# Altium PCB PCB1.PcbDoc
Units mil, origin at the board's own origin, x right, y up, seen from the top; angles counter-clockwise.
Board outline 730 x 1700 mil, 2 copper layers (Top Layer, Bottom Layer); 23 components, 44 nets, 149 pads, 19 vias.
Unrouted connection lines stored in the file: 27.
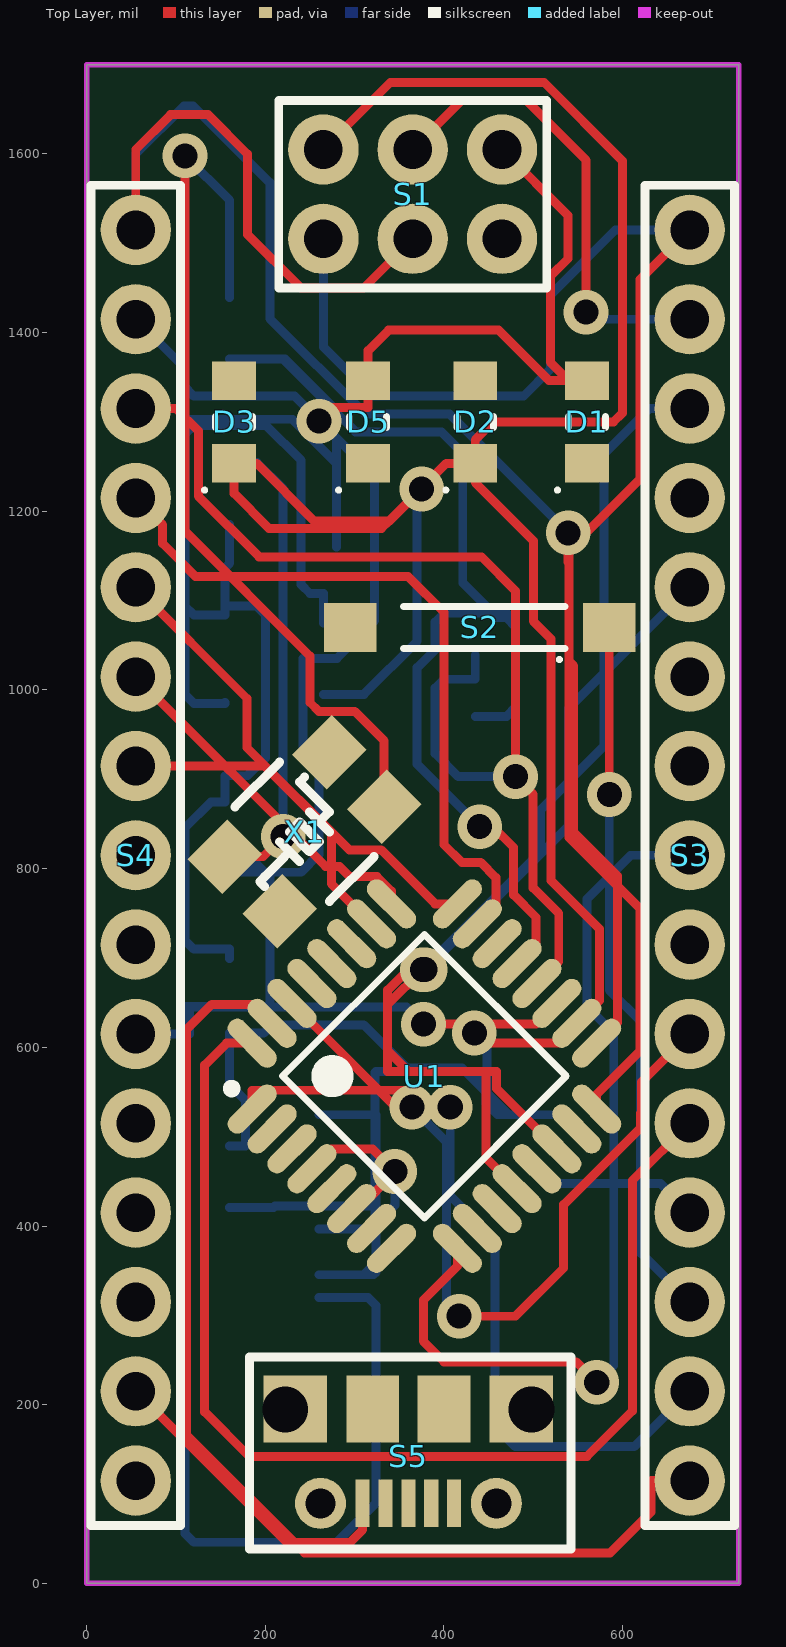
[diagram p0: Top Layer view]
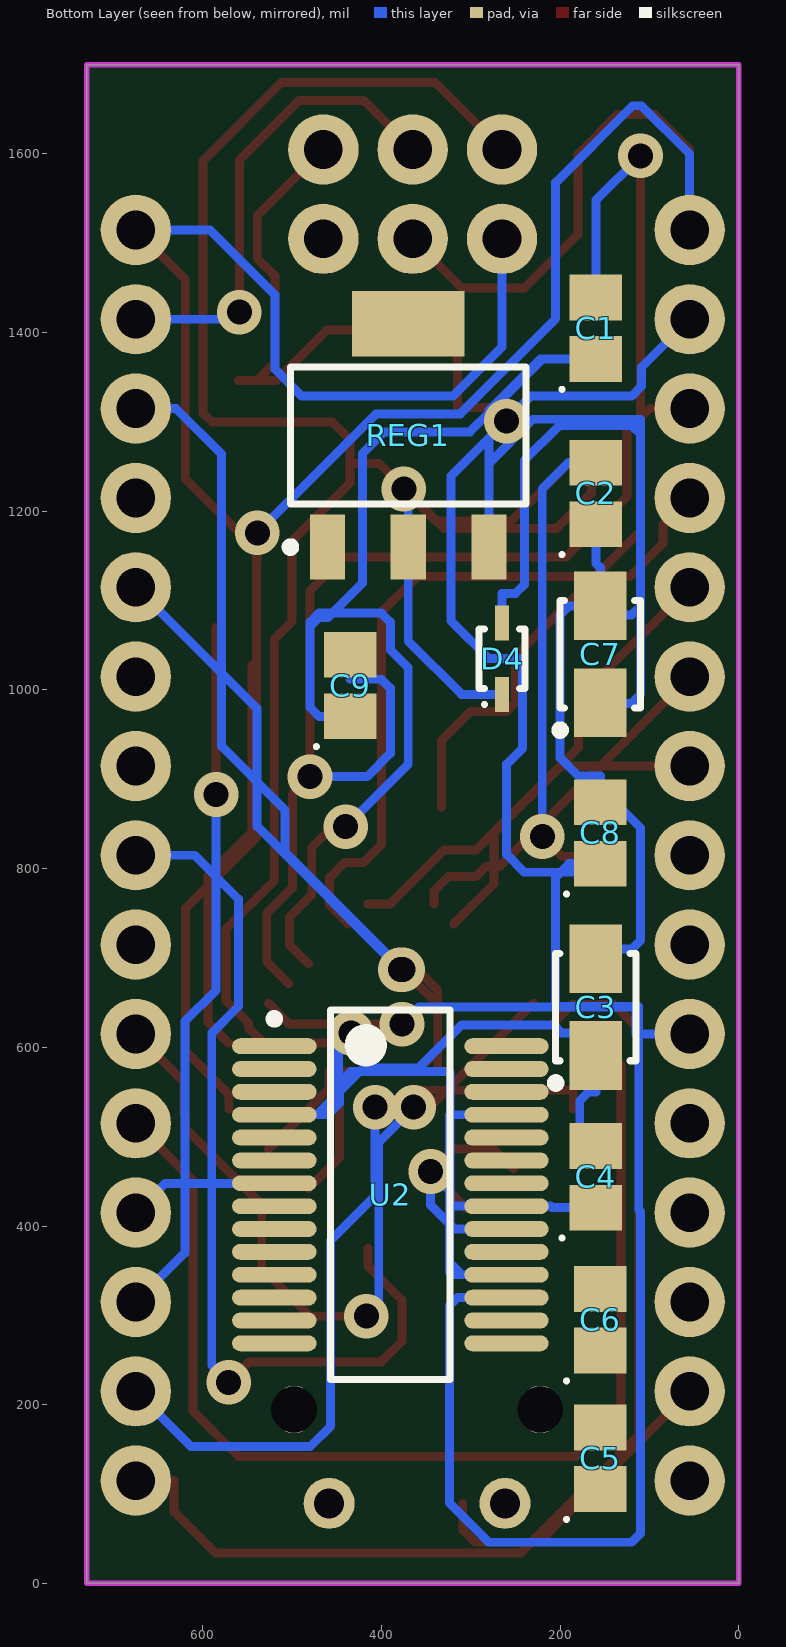
[diagram p1: Bottom Layer view, seen from below]

## Layer stack, top to bottom
Top Solder: solder mask 0.4, Solder Resist, Dk 3.5
Top Layer: signal copper 1.4
Dielectric 1: dielectric 12.6, FR-4, Dk 4.8
Bottom Layer: signal copper 1.4
Bottom Solder: solder mask 0.4, Solder Resist, Dk 3.5

## Board outline
0,0 0,1700 730,1700 730,0

## Design rules (kind name [scope] priority, off if disabled: settings)
Clearance [All] p1: gap=10 ignorepadtopadclearanceinfootprint=FALSE except(0: Arc-Hole Track-Hole SMDPad-Hole THPad-Hole Via-Hole Fill-Hole Poly-Hole Region-Hole Text-Hole)
PolygonConnect [All] p1: connectstyle=Relief reliefconductorwidth=10 reliefentries=4 polygonreliefangle="90 Angle" airgapwidth=10
RoutingVias [All] p1: holewidth=28 width=50 viastyle="Through Hole" minholewidth=28 minwidth=50 maxholewidth=28 maxwidth=50
SolderMaskExpansion [All] p1: expansion=4 istentingtop=FALSE
Width [All] p1: maxlimit=10 minlimit=10 preferedwidth=10
30 further rules are at their usual default settings.

## Components (designator, comment, footprint, x,y, rotation, side; value= is the part's Value field where it differs from the comment)
C1 "C0805C180J5GACTU" CAPCP2012X09N 160,1405 r90 bottom
C2 "C0805C180J5GACTU" CAPCP2012X09N 160,1220 r90 bottom
C3 "Capacitor SMT Tantalum" "CASE A - 3216X18" 160,645 r90 bottom value=4.7µF
C4 "100nF Ceramic Multilayer Capacitor_1" CAPCP2012X09N 160,455 r90 bottom
C5 "100nF Ceramic Multilayer Capacitor_1" CAPCP2012X09N 155,140 r90 bottom
C6 "100nF Ceramic Multilayer Capacitor_1" CAPCP2012X09N 155,295 r90 bottom
C7 "Capacitor SMT Tantalum" "CASE A - 3216X18" 155,1040 r90 bottom value=4.7µF
C8 "100nF Ceramic Multilayer Capacitor_1" CAPCP2012X09N 155,840 r90 bottom
C9 "100nF Ceramic Multilayer Capacitor_1" CAPCP2012X09N 435,1005 r90 bottom
D1 "Kingbright Blue LED, 60 mcd 120 ° 0805" LED1913X12NBLUE 560,1300 r90 top
D2 "Kingbright Red LED, 100 mcd 120 ° 0805" LED1913X12NRED 435,1300 r90 top
D3 "Kingbright Green LED, 70 mcd 120 ° 0805" LED1913X12NGREEN 165,1300 r90 top
D4 "Panasonic DB2J20900L Schottky Diode, 0.5A, 20V, 2.4ns, 2-Pin SMini2 F5 B" DIOM1712X07N 265,1035 r90 bottom
D5 "Kingbright Red LED, 100 mcd 120 ° 0805" LED1913X12NRED 315,1300 r90 top
REG1 "LM1117MP-5.0/NOPB, Low Dropout Voltage Regulator, 1.5A, 5 V ±1%, 4-Pin SOT-223" SOT230P700X180-4N 370,1285 r90 bottom
S1 "Programming Headers Dual Row" "ISP HEADER" -430,2060 r0 top
S2 "Button Tactile Switch, NO 0.05 A 0.8mm" Button8014X17N 445,1070 r180 top
S3 "connector;str header;single row;.1 cont centers;.095 tail;gold or gtx;36 contact" Header 675,115 r90 top
S4 "connector;str header;single row;.1 cont centers;.095 tail;gold or gtx;36 contact" Header 55,115 r90 top
S5 "NewMolex Right Angle SMT Female Type B Micro USB Connector, 30 V ac, 1.8A" MicroUSB 408.58,89.57 r180 top
U1 "ATMEGA328P-AU" TQFP80P900X900X120-32N 378.11,567.78 r45 top
U2 "FT232RL, Universal Asynchronous Receiver & Transmitter 3MBd, 28-Pin, SSOP" SOP65P780X200-28N 390,435 r180 bottom
X1 "Aker 16MHz Crystal SMT" "Aker S5C Crystal" 271.7,930.33 r45 top value=16MHz

## Footprints (in the part's own frame and the unit in brackets; to place one, negate y for a bottom-side part, rotate by r counter-clockwise, add the part's x,y. Pads: shape width x height; smd on the part's side, far side on the other; paste and mask are expansions set on the pad)
"Aker S5C Crystal" [mm]
  rect 1.6x1.4 smd: 1(0,0) 2(-4.2,0) 3(0,-2.2) 4(-4.2,-2.2)
  round 0.254 on Top Overlay: 5(-3,-2.4)
  silkscreen extent -4,-3 -1,0.8, body extent -4.7,-2.8 0.5,0.6, height 1
Button8014X17N [mm] "Chip Inductor, 2-Leads, Body 8.00x1.40mm, IPC Medium Density"
  rect 1.5x1.4 smd: 1(-3.556,0) 2(3.81,0)
  silkscreen extent -2.3,-0.6 2.3,0.96, body extent -3.79,-1.92 4.21,1.78, height 2.5
CAPCP2012X09N [mm] "Chip Capacitor, 2-Leads, Body 2.00x1.25mm, IPC Medium Density"
  rect 1.3x1.5 smd: 1(-0.875,0) 2(0.875,0)
  silkscreen extent -1.79,0.91 -1.69,1.01, body extent -1.05,-0.57 0.95,0.68, height 0.78
"CASE A - 3216X18" [mm] "Molded Capacitor, 2-Leads, Body 3.2x1.6mm, IPC Medium Density"
  rect 1.95x1.5 smd: 1(-1.375,0) 2(1.375,0)
  silkscreen extent -2.28,-1.14 1.52,1.27, body extent -1.52,-0.76 1.65,0.84, height 1.77
DIOM1712X07N [mm] "Molded Diode, 2-Leads, Body 1.70x1.25mm, IPC Medium Density"
  rect 1x0.4 smd: 1(-1.016,0) 2(1.016,0)
  silkscreen extent -1.35,-0.65 0.85,0.65, body extent -0.9,-0.45 0.9,0.45, height 0.8
Header [mm] "SIL Header"
  round 2 hole 1.1: 1(0,0) 2(2.54,0) 3(5.08,0) 4(7.62,0) 5(10.16,0) 6(12.7,0) 7(15.24,0) 8(17.78,0) 9(20.32,0) 10(22.86,0) 11(25.4,0) 12(27.94,0) 13(30.48,0) 14(33.02,0) 15(35.56,0)
  silkscreen extent -1.27,-1.27 36.83,1.27, body extent -1.33,-1.35 36.93,1.35, height 8.6
"ISP HEADER" [mm] "SIL Header for programming"
  round 2 hole 1.1: 1(17.653,-14.097) 2(17.653,-11.557) 3(20.193,-14.097) 4(20.193,-11.557) 5(22.733,-14.097) 6(22.733,-11.557)
  silkscreen extent 16.38,-15.49 24,-10.16, body extent 16.38,-15.37 24,-10.29, height 8
LED1913X12NBLUE [mm] "LED 2-Leads, Body 1.90x1.32mm, IPC Medium Density"
  rect 1.1x1.25 smd: 1(-1.175,0) 2(1.175,0)
  silkscreen extent -1.99,-0.53 0.15,0.89, body extent -1,-0.62 1.02,0.62, height 1.1
LED1913X12NGREEN [mm] "LED 2-Leads, Body 1.90x1.32mm, IPC Medium Density"
  rect 1.1x1.25 smd: 1(-1.175,0) 2(1.175,0)
  silkscreen extent -1.99,-0.53 0.15,0.89, body extent -1.01,-0.62 1.01,0.63, height 1.1
LED1913X12NRED [mm] "LED 2-Leads, Body 1.90x1.32mm, IPC Medium Density"
  rect 1.1x1.25 smd: 1(-1.175,0) 2(1.175,0)
  silkscreen extent -1.99,-0.53 0.15,0.89, body extent -1.02,-0.43 1.04,0.47, height 0.85
MicroUSB [mm] "MicroUSB  Molex 5Pin"
  rect 0.4x1.35 smd: 1(-0.07,0) 2(0.58,0) 3(1.23,0) 4(1.88,0) 5(2.53,0)
  rrect50% 0.6x1.3 hole 1.3: ""(-2.27,-2.667) ""(-2.27,-2.667) ""(4.73,-2.667)
  rect 1.8x1.9 smd: ""(-1.98,-2.678) ""(4.45,-2.678)
  round 1.45 hole 0.85: ""(-1.27,0) ""(3.73,0)
  rect 1.5x1.9 smd: ""(0.218,-2.678) ""(2.242,-2.678)
  silkscreen extent -3.39,-4.17 5.75,1.3, body extent -2.83,-5.32 5.37,0.11, height 2.68
SOP65P780X200-28N [mm] "SOP, 28-Leads, Body 10.20x5.30mm, Pitch 0.65mm, IPC Medium Density"
  oval 2.4x0.45 smd: 1(-3.3,4.225) 2(-3.3,3.575) 3(-3.3,2.925) 4(-3.3,2.275) 5(-3.3,1.625) 6(-3.3,0.975) 7(-3.3,0.325) 8(-3.3,-0.325) 9(-3.3,-0.975) 10(-3.3,-1.625) 11(-3.3,-2.275) 12(-3.3,-2.925) 13(-3.3,-3.575) 14(-3.3,-4.225) 15(3.3,-4.225) 16(3.3,-3.575) 17(3.3,-2.925) 18(3.3,-2.275) 19(3.3,-1.625) 20(3.3,-0.975) 21(3.3,-0.325) 22(3.3,0.325) 23(3.3,0.975) 24(3.3,1.625) 25(3.3,2.275) 26(3.3,2.925) 27(3.3,3.575) 28(3.3,4.225)
  silkscreen extent -3.43,-5.25 1.7,5.25, body extent -3.91,-5.1 3.91,5.1, height 2
SOT230P700X180-4N [mm] "SOT223, 4-Leads, Body 6.50x7.00mm (avg), Pitch 2.30mm, IPC Medium Density"
  rect 1.85x1 smd: 1(-3.175,2.3) 2(-3.175,0) 3(-3.175,-2.3)
  rect 1.85x3.2 smd: 4(3.175,0)
  silkscreen extent -3.3,-3.35 1.95,3.48, body extent -3.8,-3.12 3.29,3.38, height 1.65
TQFP80P900X900X120-32N [mm] "TQFP, 32-Leads, Body 7.00x7.00mm, Pitch 0.80mm, IPC Medium Density"
  oval 1.75x0.55 smd: 1(-4.125,2.8) 2(-4.125,2) 3(-4.125,1.2) 4(-4.125,0.4) 5(-4.125,-0.4) 6(-4.125,-1.2) 7(-4.125,-2) 8(-4.125,-2.8) 17(4.125,-2.8) 18(4.125,-2) 19(4.125,-1.2) 20(4.125,-0.4) 21(4.125,0.4) 22(4.125,1.2) 23(4.125,2) 24(4.125,2.8)
  oval 0.55x1.75 smd: 9(-2.8,-4.125) 10(-2,-4.125) 11(-1.2,-4.125) 12(-0.4,-4.125) 13(0.4,-4.125) 14(1.2,-4.125) 15(2,-4.125) 16(2.8,-4.125) 25(2.8,4.125) 26(2,4.125) 27(1.2,4.125) 28(0.4,4.125) 29(-0.4,4.125) 30(-1.2,4.125) 31(-2,4.125) 32(-2.8,4.125)
  silkscreen extent -4.25,-2.85 2.85,3.75, body extent -4.44,-4.5 4.56,4.5, height 1.6

## Part data
C1 C2: library part "18pF Ceramic Multilayer Capacitor, 50 V dc C0G Dielectric ±5% SMD", "18pF Ceramic Multilayer Capacitor, 50 V dc C0G Dielectric ±5% SMD", Capacitance=18pF, Manufacturer=Kemet, Package=0805, Voltage=50V, Creator="Ritesh Kanjee", Datasheet URL=http://za.rs-online.com/web/p/ceramic-multilayer-capacitors/6480935/?searchTerm=C0805C180J5GACTU&relevancy-data=636F3D3226696E3D4931384E4B6E6F776E41734D504E266C753D656E266D6D3D6D61746368616C6C7061727469616C26706D3D5E5B5C707B4C7D5C707B4E647D2D2C2F255C2E5D2B2426706F3D313326736E3D592673743D4D414E5F504152545F4E554D4245522677633D424F5448267573743D4330383035433138304A35474143545526, Date Created="18 February 2015", RS Stock No.=648-0935
C3 C7: library part "4.7µF Tant RS 496-3545", "Capacitor,tantalum,SMT,16V,4.7uF,10%,A-case", Package=3216-18, Tolerance=10%, Voltage=16V, ComponentLink1Description="Supplier Website", ComponentLink1URL=http://za.rs-online.com/web/search/searchBrowseAction.html?method=getProduct&R=4963545, ComponentLink2Description="RS Data sheet", ComponentLink2URL=http://docs-europe.origin.electrocomponents.com/webdocs/04ed/0900766b804ed4cc.pdf, LatestRevisionDate=28-April-2010, Part Originator="H Theron", Publisher=DPSS, RS Stock Nr.=496-3545
C4 C5 C6 C8 C9: "AVX 0805 Standard 100nF Ceramic Multilayer Capacitor, 50 V dc X7R Dielectric ±10% SMD", Capacitance=100nF, Manufacturer=AVX, Package=0805, Voltage=50V, Creator="Ritesh Kanjee", Datasheet URL=http://za.rs-online.com/web/p/ceramic-multilayer-capacitors/4646688/, Date Created="18 February 2015", RS Stock No.=464-6688
D1: Color=Blue, Forward Voltage=3.2V, Manufacturer=KingBright, Manufacturer Part No.=KP-2012PBC-A, Creator="Ritesh Kanjee", Datasheet URL=http://za.rs-online.com/web/p/visible-leds/4663784/, Date Created="18 February 2015", RS Stock No.=466-3784
D2 D5: Color=RED, Forward Voltage=1.85V, Manufacturer=KingBright, Manufacturer Part No.=KP-2012SRC-PRV, Creator="Ritesh Kanjee", Datasheet URL=http://za.rs-online.com/web/p/visible-leds/4663813/, Date Created="18 February 2015", RS Stock No.=466-3813
D3: Color=Green, Forward Voltage="2.1 V", Manufacturer=KingBright, Manufacturer Part No.=KP-2012MGC, Creator="Ritesh Kanjee", Datasheet URL=http://za.rs-online.com/web/p/visible-leds/4663778/, Date Created="18 February 2015", RS Stock No.=466-3778
D4: library part "Schottky Diode, 0.5A, 20V, 2.4ns, 2-Pin SMini2 F5 B", Manufacturer=Panasonic, Manufacturer Part No.=DB2J20900L, Maximum Continuous Forward Current=0.5A, Peak Reverse Repetitive Voltage=20V, Created By="R Kanjee", Datasheet=http://docs-europe.electrocomponents.com/webdocs/1398/0900766b813986b3.pdf, Date Created="1 March 2015", RS Stock No.=713-2703
REG1: library part LM1117MP-5.0, Manufacturer="Texas Instruments", Maximum Input Voltage=15V, Output Voltage=5V, Supply Current=1.5Amps, Created By="R Kanjee", Datasheet URL=http://za.rs-online.com/web/p/low-dropout-voltage-regulators/5339583/, Date Created="26 February 2015", RS Stock No.=533-9583
S1: library part "Programming ISP, Programming Headers Dual Row", Current Rating="3Amps Continuous", Manufacturer=FCI, Manufacturer Part No.=68000-236HLF, Created By="R Kanjee", Date Created="1 March 2015", RS Stock No.=2509565626
S2: Manufacturer="C & K", Manufacturer Part No.=B3F1000, Creator="R Kanjee", Date Created="25 February 2015", RS Stock No.=516-255, State="Normaly Open"
S3 S4: library part "Single row; PCB headers", Current Rating="3Amps Continuous", Manufacturer=FCI, Manufacturer Part No.=68000-236HLF, Created By="R Kanjee", Date Created="1 March 2015", RS Stock No.=2509565626
S5: library part "Micro USB Connector, 30 V ac, 1.8A", Manufacturer=Molex, Manufacturer Part No.=105017-0001, Max Current=1.8A, Max Voltage=30V, Creator="R Kanjee", Datasheet URL=http://za.rs-online.com/web/p/micro-usb-connectors/8486764/, Date Created="28 February 2015", RS Stock No=848-6764
U1: "ATMEGA328P-AU, 8 bit AVR Microcontroller 20MHz 1 kB, 32 kB Flash, 2 kB RAM, I2C 32-Pin TQFP", Company="Lumina Inova", Created By="Ritesh Kanjee", Datasheet URL=http://docs-europe.electrocomponents.com/webdocs/0db4/0900766b80db4deb.pdf, Date Created="14 February 2015", RS Stock No.=696-3092
U2: library part "FT232RL USB to UART, Universal Asynchronous Receiver & Transmitter 3MBd, 28-Pin, SSOP", Manufacturer="FTDI Chip", Manufacturer Part No.=FT232RL, Creator="R Kanjee", Date Created="03 March 2015", Pin Count=28, RS Stock No.=406-580
X1: library part "Aker  C5S-16.000-12-3030-X", "Aker S5C SMT Crystal", Frequency Stability=+/-30ppm, Load Capacitance=12pF, Manufacturer=Aker, Manufacturer Part #=C5S-16.000-12-3030-X, Package="3.2x5mm SMD", Creator="R Kanjee", HelpURL=http://za.rs-online.com/web/p/crystal-units/6719488/, RS="RS 671-9488", RS Stock Nr.=671-9488, Supplier=RS

## Via types
v1: diameter 50, hole 28, Top Layer to Bottom Layer, 19 vias

## Nets (pads, with @x,y where several pads share a name; then routed paths per layer and width w, separated by ;. In a path a pad name is that pad's centre, name@x,y a point inside that pad or via, vN(x,y) a via of type N, cw(c..) or ccw(c..) an arc to the next point about the centre after c; other vN are vias at no path point)
3V3: C8.1 S4.14 U2.17 | length 2371.1
  Bottom Layer w10: S4.14 109,1361 109,1340 120,1329 232.71,1329 322.24,1239.46 322.24,1077.5 280,1035.25 242,1035.25 242,935 260,917 260,816 240,796 199.55,796 ; U2.17 315.16,319.84 324,311 324,90 280,46 120,46 110,56 110,416 112,418 112,645.75 205,645.75 205,790.55 199.55,796 ; 199.55,796 190,805.55 C8.1 155,796 199.55,796
+5: C3.1 C4.2 D2.1 D3.1 D4.1 REG1.2 S1.2 S4.4 U1.4 U1.6 U1.18 U2.4 U2.20 | length 3971.4
  Top Layer w10: U1.4 274.06,486 320,486 v1(344.98,461) 345,460 304.54,419.54 U1.6 ; S1.2 340,1680 512,1680 599.61,1592.39 599.61,1310 589.61,1300 455,1300 435,1280 D2.1 ; v1(375,1225) 339,1189 338,1189 ; v1(434,616) 445,605 532,605 548.63,621.63 U1.18 574,652.32 574,732.65 520,786.65 520,1057 500,1077 500,1167 435,1232 D2.1 ; 338,1189 402.74,1253.74 D2.1 ; 338,1189 330,1181 204,1181 165,1220 D3.1 190.26,1253.74 255,1189 338,1189
  Bottom Layer w10: C4.2 178.03,489.45 178.03,540 167.99,550.04 160,550.04 C3.1 160,616 198,616 207.2,625.2 310,625.2 358.2,577 420,577 424,573 ; U2.20 318.3,396.61 ; D4.1 310.28,995 370,1054.72 REG1.2 370,1220 v1(375,1225) ; v1(434,616) 448,602 448,549 ; U2.4 472.43,524.57 ; 318.3,396.61 323,401.32 ; 318.3,396.61 323,396.61 323,401.32 ; 323,401.32 344.98,423.3 v1(344.98,461) 323,439 ; 323,401.32 323,439 ; 323,439 323,572 324,573 424,573 ; 424,573 447,550 ; 424,573 434,573 447,560 447,550 ; 447,550 448,549 ; 447,550 447,537.57 448,536.57 ; 448,536.57 448,549 ; 448,536.57 460,524.57 472.43,524.57 ; 448,549 472.43,524.57
  other v1: 345,461
A0: S4.12 U1.23 | length 803.9
  Top Layer w10: S4.12 85,1185 85,1164 122,1127 360,1127 400,1087 400,827 420,807 441,807 458,790 458,759.02 U1.23
A1: S4.11 U1.24 | length 539
  Top Layer w10: S4.11 179.5,990.5 179.5,935.5 294,821 329.57,821 390,760.57 U1.24
A2: S4.10 U1.25 | length 399.9
  Top Layer w10: S4.10 267.35,802.65 282.89,802.65 294.54,791 325,791 341.23,774.77 U1.25
A3: S4.9 U1.26 | length 370.4
  Top Layer w10: S4.9 199,915 274,840 274,783.25 U1.26
A4: S4.8 U1.27
A5: S4.7 U1.28
A6: S4.6 U1.19 | length 519
  Top Layer w10: v1(377,626) 503.14,626 U1.19
  Bottom Layer w10: S4.6 115,615 115,645 177.63,645 177.83,645.2 357.8,645.2 v1(377,626)
A7: S4.5 U1.22
AREF: C9.2 S4.13 U1.20 | length 1272.3
  Top Layer w10: S4.13 100,1315 125,1290 125,1217 193,1149 442,1149 480,1111 v1(480,903) 499.81,883.19 499.81,778.56 528.43,749.93 528.43,695.83 U1.20
  Bottom Layer w10: C9.2 435,1012 400,1012 390,1002 390,929 416,903 v1(480,903)
D0/Rx: S3.2 U1.30 | length 856.2
  Top Layer w10: U1.30 346.08,533 v1(407,533)
  Bottom Layer w10: v1(407,533) 407,434 457,384 457,176 480,153 613,153 S3.2
D1/Tx: S3.1 U1.31 | length 1241.7
  Top Layer w10: U1.31 186.54,648 140,648 112,620 112,166 244,34 586,34 632,80 632,115 S3.1
D2: S3.5 U1.32 | length 1320.9
  Top Layer w10: U1.32 156.67,604.67 132,580 132,192 182,142 560,142 611,193 611,451 S3.5
D3: S3.6 U1.1 | length 934.5
  Top Layer w10: U1.1 185.33,552 364,552 v1(364,533) ; v1(417,299) 480,299 534,353 534,424 620,510 620,526 621,527 621,561 S3.6
  Bottom Layer w10: v1(364,533) 403,494 403,313 v1(417,299)
D4: S3.7 U1.2
D5: S3.8 U1.9 | length 1029.4
  Top Layer w10: U1.9 415,355 377,317 377,271 400,248 548,248 v1(571,225)
  Bottom Layer w10: v1(571,225) 590,244 590,616 560,646 560,766 609,815 S3.8
D6: S3.9 U1.10
D7: S3.10 U1.11
D8: S3.11 U1.12 | length 935.2
  Top Layer w10: v1(378.93,687) 360,687 337,664 337,596 360,573 447,573 447,476.63 U1.12
  Bottom Layer w10: v1(378.93,687) 539.17,847.24 539.17,979.17 S3.11
D9: S3.12 U1.13
D10: S3.13 U1.14 | length 1144.9
  Top Layer w10: v1(376,687) 337,648 337,573 459,573 459,553.71 U1.14
  Bottom Layer w10: v1(376,687) 508.1,819.1 508.1,865.97 579,936.88 579,1264 630,1315 S3.13
D11/MOSI: S1.4 S3.14 U1.15 | length 533.8
  Top Layer w10: S1.4 420,1660 492,1660 559,1593 v1(559,1423)
  Bottom Layer w10: v1(559,1423) 567,1415 S3.14
D12/MISO: S1.1 S3.15 U1.16 | length 1772.6
  Top Layer w10: U1.16 570.9,547.49 619.56,596.15 619.56,755.26 540,834.81 540,1157 619.61,1236.61 619.61,1459.61 S3.15
  Bottom Layer w10: S1.1 265,1384 320,1329 489,1329 519,1359 519,1442 592,1515 S3.15
D13/SCK: S1.3 S4.15 U1.17 | length 2054.8
  Top Layer w10: S4.15 55,1605 94,1644 136,1644 180,1600 180,1510 240,1450 310,1450 S1.3 ; v1(539,1176) 539,1143 540,1143 540,1032 545,1027 545,841 594,792 594,627.77 U1.17
  Bottom Layer w10: S4.15 55,1600 109,1654 119,1654 205,1568 205,1415.71 311.71,1309 406,1309 v1(539,1176)
GND: C1.1 C2.1 C3.2 C4.1 C6.1 C7.2 C8.2 C9.1 D1.2 D5.2 REG1.3 S1.6 S3.4 S4.2 S5.5 U1.3 U1.5 U1.21 U2.7 U2.18 U2.21 U2.25 | length 4310.5
  Top Layer w10: S4.2 224,46 294.98,46 308.98,60 S5.5 ; v1(260,1301) 275,1316 315,1316 D5.2 315,1380 337.92,1402.92 461.08,1402.92 517.74,1346.26 D1.2@539.61,1346.26 ; v1(440,847) 454.68,847 478,823.68 478,770.56 503,745.56 503,714.94 U1.21 ; S1.6 539,1531 539,1483 519,1463 519,1366.87 D1.2@539.61,1346.26 ; D1.2 D1.2@539.61,1346.26
  Bottom Layer w10: C4.1 209,420.55 210.65,422.2 U2.21 324,422.2 ; C3.2 160,710 120,710 110,720 110,845.51 138.94,874.45 C8.2 155,904 180,904 200,924 200,1084.13 190,1094.13 C7.2 ; C2.1 160,1142 155,1137 C7.2 ; C1.1 219.44,1370.55 ; U2.18 310,345.43 ; U2.25 324,524.57 324,422.2 ; REG1.3 279.45,1253.97 ; C9.1 470,970.55 480,980.55 480,1071 ; v1(440,847) 370,917 370,1025 390,1045 390,1076 400,1086 455,1086 ; U2.7 642.2,447.8 S3.4 ; C7.2 155,1084 120,1084 110,1094 110,1303.07 230.35,1303.07 279.45,1253.97 ; 219.44,1370.55 221.88,1370.55 279.45,1312.98 v1@278.23,1311.76 ; 219.44,1370.55 v1@278.23,1311.76 ; v1@278.23,1311.76 267.47,1301 v1(260,1301) 279.45,1281.55 279.45,1253.97 ; v1@278.23,1311.76 300.99,1289 397,1289 421,1265 421,1120 455,1086 ; 310,345.43 321,345.43 324,348.43 324,359.43 ; 310,345.43 324,359.43 ; 324,359.43 324,422.2 ; 455,1086 470,1086 480,1076 480,1071 ; 455,1086 460,1081 470,1081 480,1071
NetC1_2: C1.2 X1.3 | length 1024
  Top Layer w10: v1(110,1598) 110,1178 250,1038 250,986 260,976 300,976 332.95,943.05 X1.3
  Bottom Layer w10: v1(110,1598) 160,1548 C1.2
NetC2_2: C2.2 X1.2 | length 535.8
  Top Layer w10: X1.2 197.41,813.41 v1(220,836)
  Bottom Layer w10: C2.2 190.66,1254.45 220,1225.11 v1(220,836)
NetC5_2: C5.2 U2.2
NetD1_1: D1.1
NetD2_2: D2.2
NetD3_2: D3.2
NetD5_1: D5.1
NetR5_1: U2.23
NetR6_1: U2.22
NetS5_2: S5.2 U2.16
NetS5_3: S5.3 U2.15
RESET: C5.1 S1.5 S2.1 S3.3 S4.3 U1.29 | length 792.3
  Top Layer w10: v1(585,883) S2.1
  Bottom Layer w10: v1(585,883) 585,664 620,629 620,370 S3.3
Rx: U2.1
Tx: U2.5
VIN: REG1.1 S4.1
VUSB: C6.2 C7.1 D4.2 S5.1 | length 692.4
  Bottom Layer w10: C7.1 155,985 120,985 110,995 110,1286 120,1296 201,1296 240,1257 240,1118 250,1108 265,1108 D4.2
XTAL1: U1.7 X1.1
XTAL2: U1.8 X1.4
pads on no net: REG1.4 S2.2 S5. S5.4 U2.3 U2.6 U2.8 U2.9 U2.10 U2.11 U2.12 U2.13 U2.14 U2.19 U2.24 U2.26 U2.27 U2.28 X1.5

## Keep-outs
Keep-Out Layer:
  the board outline again, w6